# Altium PCB AUO.PcbDoc
Units mm, origin at the board's own origin, x right, y up, seen from the top; angles counter-clockwise.
Board outline 52.45 x 56.64 mm, 2 copper layers (Top Layer, Bottom Layer); 9 components, 36 nets, 94 pads, 8 vias.
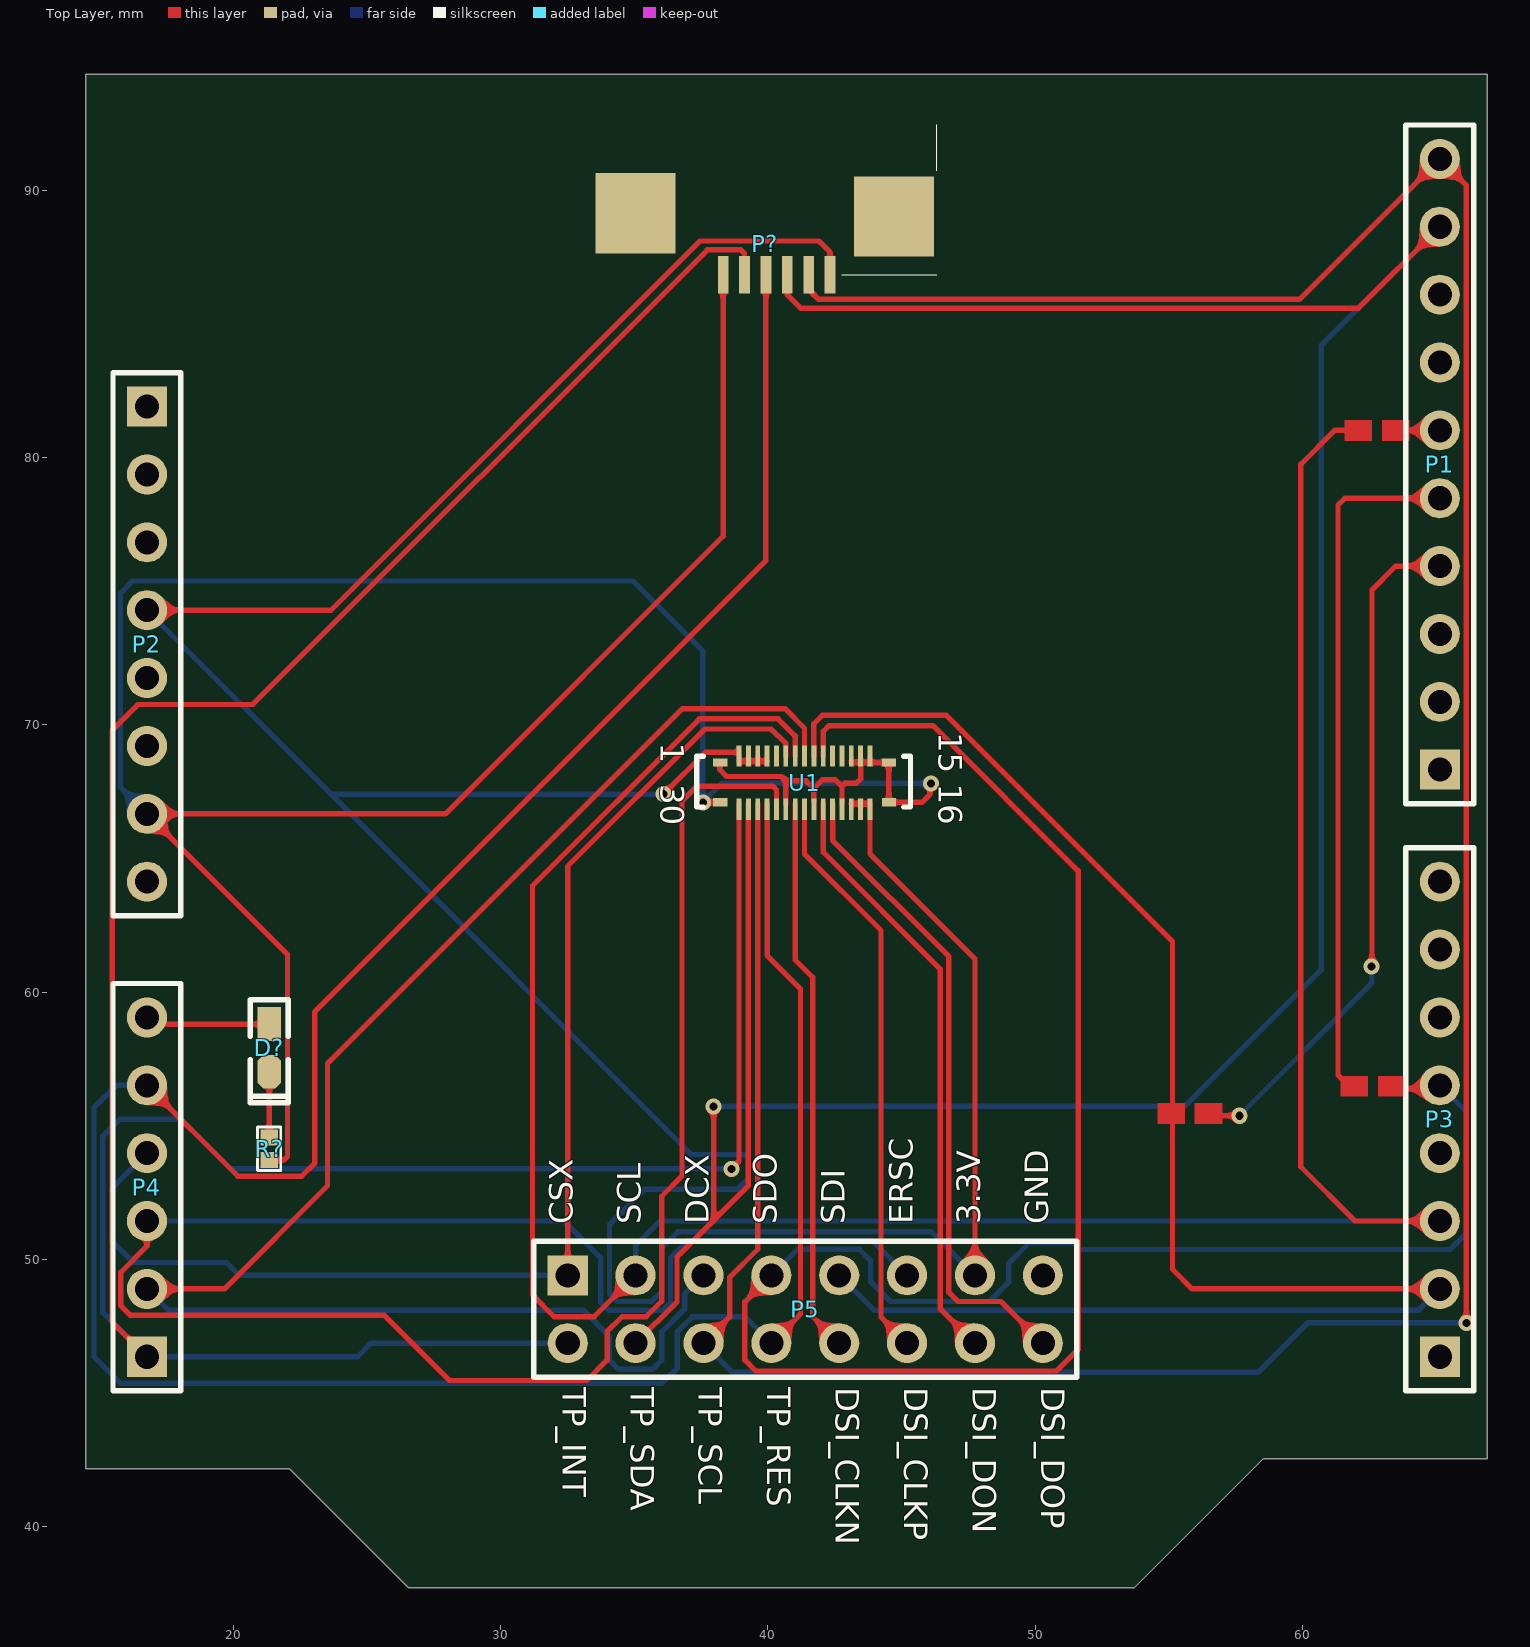
[diagram p0: Top Layer view]
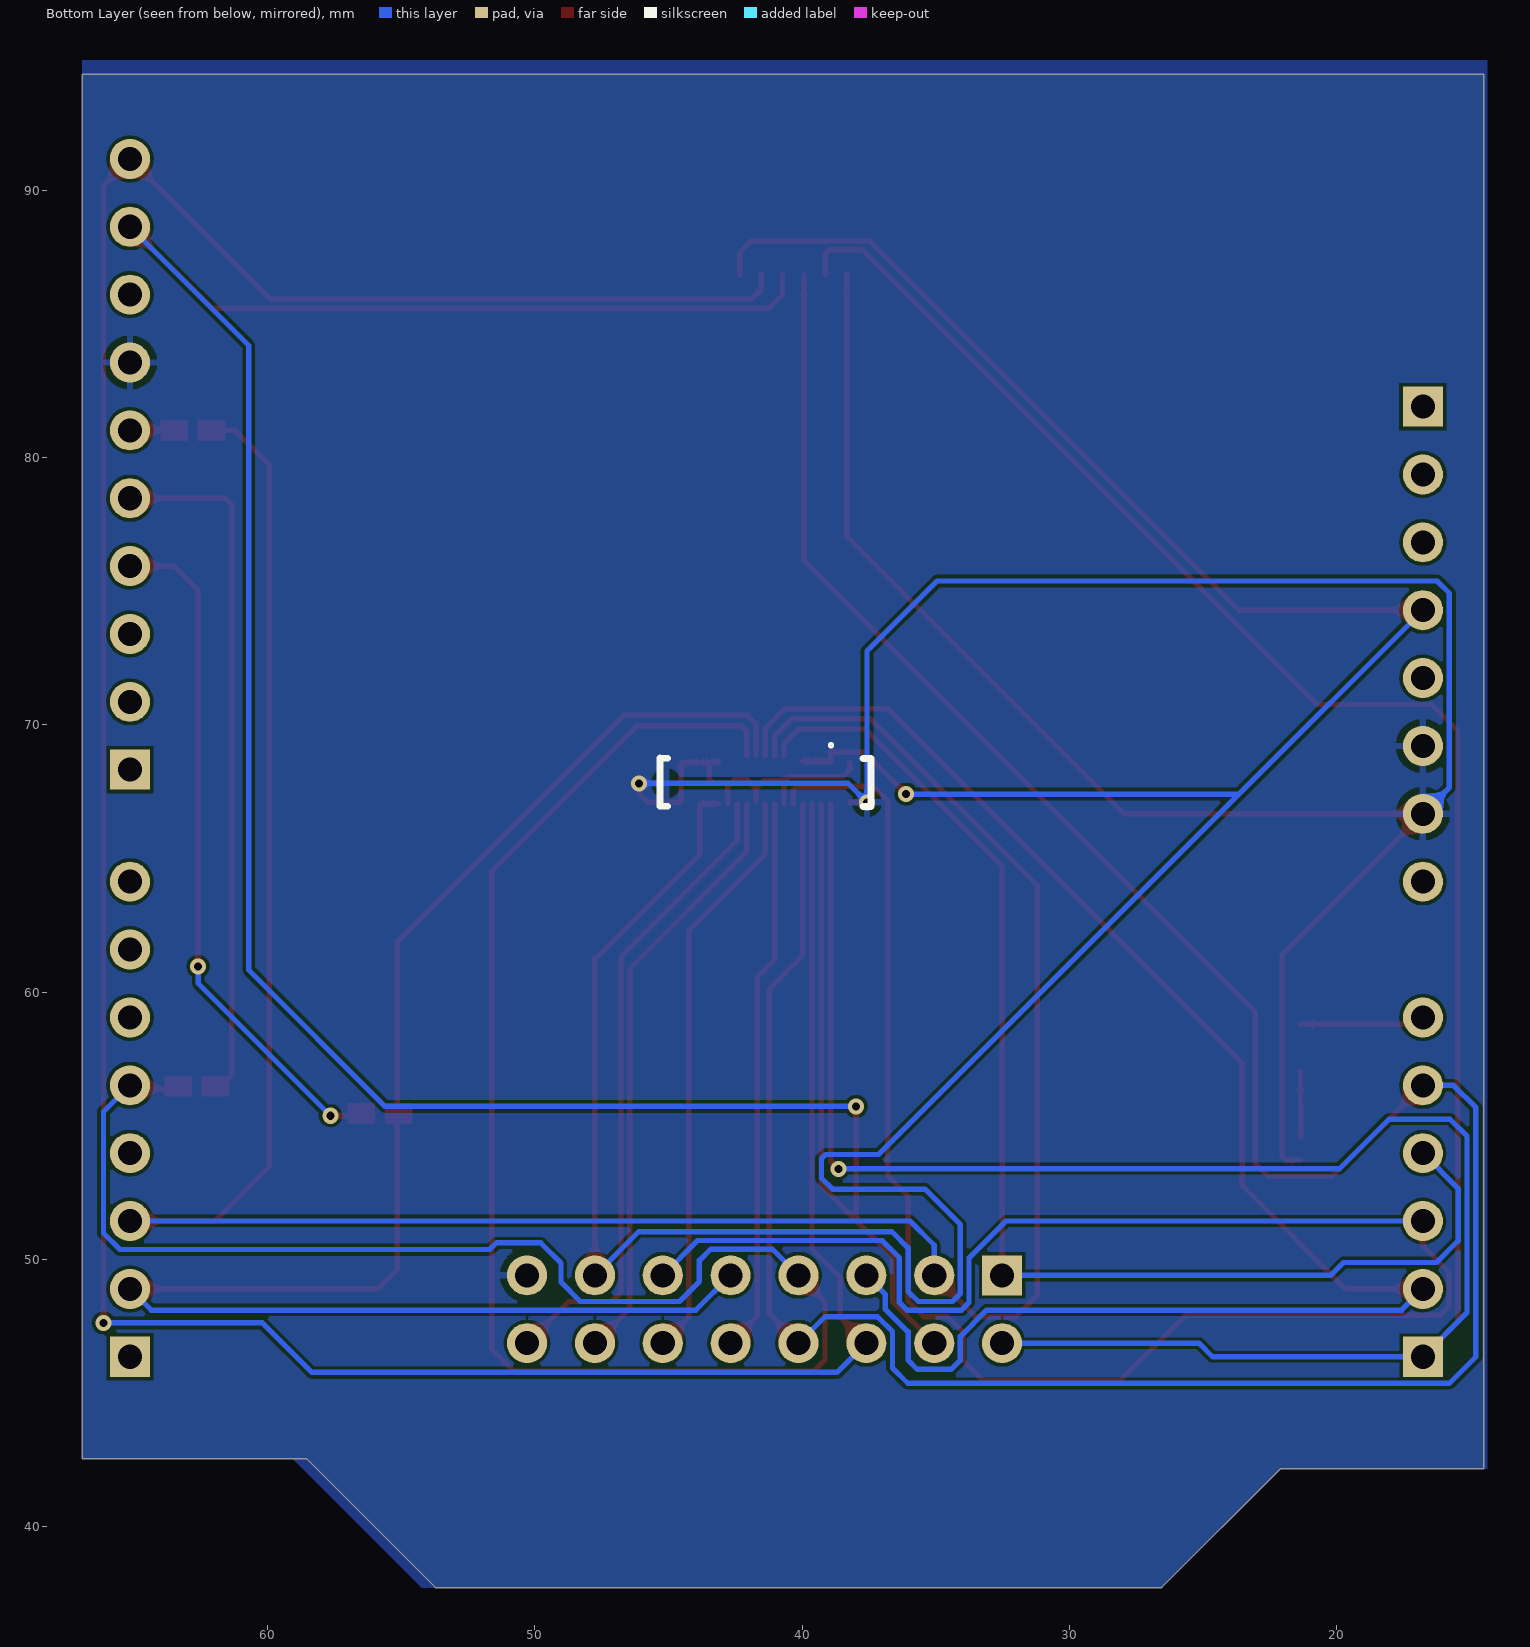
[diagram p1: Bottom Layer view, seen from below]

## Layer stack, top to bottom
Top Solder: solder mask 0.0102, Solder Resist, Dk 3.5
Top Layer: signal copper 0.0356
Dielectric 1: dielectric 0.32, FR-4, Dk 4.8
Bottom Layer: signal copper 0.0356
Bottom Solder: solder mask 0.0102, Solder Resist, Dk 3.5

## Board outline
14.478,42.164 14.478,94.361 66.929,94.361 66.929,42.545 58.547,42.545 53.721,37.719 26.543,37.719 22.098,42.164

## Design rules (kind name [scope] priority, off if disabled: settings)
Clearance [All] p1: gap=0.127 ignorepadtopadclearanceinfootprint=FALSE
PolygonConnect [All] p1: connectstyle=Relief reliefconductorwidth=0.254 reliefentries=4 polygonreliefangle="90 Angle" airgapwidth=0.254
RoutingVias [All] p1: holewidth=0.3 width=0.6 viastyle="Through Hole" minholewidth=0.3 minwidth=0.6 maxholewidth=0.3 maxwidth=0.6
SolderMaskExpansion [All] p1: expansion=0.102 istentingtop=FALSE
Width [All] p1: maxlimit=0.254 minlimit=0.102 preferedwidth=0.2
30 further rules are at their usual default settings.

## Components (designator, comment, footprint, x,y, rotation, side; value= is the part's Value field where it differs from the comment)
D? "LED" "D LED 0603B" 21.349,57.912 r270 top
P1 "Header 10" HDR1X10 65.151,68.326 r90 top locked
P2 "Header 8" HDR1X8 16.764,81.915 r270 top
P3 "Header 8" HDR1X8 65.151,46.355 r90 top locked
P4 "Header 6" HDR1X6 16.764,46.355 r90 top locked
P5 "Header 8X2" HDR2X8 32.512,49.403 r0 top locked
P? "Header 7" 7PIN_0.8MM 39.751,90.17 r0 top
R? "1KΩ ±5%" "R 0402" 21.336,54.145 r90 top
U1 "AXG130144" AXG30 37.484,68.699 r270 top

## Footprints (in the part's own frame and the unit in brackets; to place one, negate y for a bottom-side part, rotate by r counter-clockwise, add the part's x,y. Pads: shape width x height; smd on the part's side, far side on the other; paste and mask are expansions set on the pad)
7PIN_0.8MM [mm]
  rect 0.4x1.4 smd: 2(-1.422,-3.315) 3(-0.622,-3.315) 4(0.178,-3.315) 5(0.978,-3.315) 6(1.778,-3.315) 7(2.578,-3.315)
  rect 3x3 smd: 8(-4.699,-1.016) 9(4.976,-1.144)
  silkscreen extent 3.01,-3.31 6.58,2.29
AXG30 [mm]
  rect 0.8x0.18 smd: 1(-0.141,1.44) 2(-0.141,1.79) 3(-0.141,2.14) 4(-0.141,2.49) 5(-0.141,2.84) 6(-0.141,3.19) 7(-0.141,3.54) 8(-0.141,3.89) 9(-0.141,4.24) 10(-0.141,4.59) 11(-0.141,4.94) 12(-0.141,5.29) 13(-0.141,5.64) 14(-0.141,5.99) 15(-0.141,6.34) 16(1.849,6.34) 17(1.849,5.99) 18(1.849,5.64) 19(1.849,5.29) 20(1.849,4.94) 21(1.849,4.59) 22(1.849,4.24) 23(1.849,3.89) 24(1.849,3.54) 25(1.849,3.19) 26(1.849,2.84) 27(1.849,2.49) 28(1.849,2.14) 29(1.849,1.79) 30(1.849,1.44)
  rect 0.31x0.53 smd: 31(1.593,7.045) 32(0.103,7.045) 33(0.103,0.735) 34(1.593,0.735)
"D LED 0603B" [mil] "蓝色0603LED"
  rect 50x35 smd: 1(-35,-0.26)
  oct 50x35 smd: 2(35,-0.26)
  silkscreen extent -71,-28 81,28, body extent -31,-16 31,16, height 24
HDR1X6 [mm] "Connector; Header; 6 Position"
  rect 1.5x1.5 hole 0.9: 1(0,0)
  round 1.5 hole 0.9: 2(2.54,0) 3(5.08,0) 4(7.62,0) 5(10.16,0) 6(12.7,0)
  silkscreen extent -1.27,-1.27 13.97,1.27
HDR1X8 [mm] "Connector; Header; 8 Position"
  rect 1.5x1.5 hole 0.9: 1(0,0)
  round 1.5 hole 0.9: 2(2.54,0) 3(5.08,0) 4(7.62,0) 5(10.16,0) 6(12.7,0) 7(15.24,0) 8(17.78,0)
  silkscreen extent -1.27,-1.27 19.05,1.27
HDR1X10 [mm] "Connector; Header; 10 Position"
  rect 1.5x1.5 hole 0.9: 1(0,0)
  round 1.5 hole 0.9: 2(2.54,0) 3(5.08,0) 4(7.62,0) 5(10.16,0) 6(12.7,0) 7(15.24,0) 8(17.78,0) 9(20.32,0) 10(22.86,0)
  silkscreen extent -1.27,-1.27 24.13,1.27
HDR2X8 [mm] "Connector; Header; 8x2 Position"
  rect 1.5x1.5 hole 0.9: 1(0,0)
  round 1.5 hole 0.9: 2(0,-2.54) 3(2.54,0) 4(2.54,-2.54) 5(5.08,0) 6(5.08,-2.54) 7(7.62,0) 8(7.62,-2.54) 9(10.16,0) 10(10.16,-2.54) 11(12.7,0) 12(12.7,-2.54) 13(15.24,0) 14(15.24,-2.54) 15(17.78,0) 16(17.78,-2.54)
  silkscreen extent -1.27,-3.81 19.05,1.27
"R 0402" [mm]
  rect 0.6x0.65 smd: 1(-0.424,0) 2(0.424,0)
  silkscreen extent -0.82,-0.43 0.81,0.43, body extent -0.5,-0.25 0.5,0.25, height 0.3

## Part data
D?: "发光二极管"
P1: "Header, 10-Pin", LatestRevisionDate=17-Jul-2002, LatestRevisionNote="Re-released for DXP Platform.", Publisher="Altium Limited"
P2 P3: "Header, 8-Pin", LatestRevisionDate=17-Jul-2002, LatestRevisionNote="Re-released for DXP Platform.", Publisher="Altium Limited"
P4: "Header, 6-Pin", LatestRevisionDate=17-Jul-2002, LatestRevisionNote="Re-released for DXP Platform.", Publisher="Altium Limited"
P5: "Header, 8-Pin, Dual row", LatestRevisionDate=17-Jul-2002, LatestRevisionNote="Re-released for DXP Platform.", Publisher="Altium Limited"
P?: "Header, 7-Pin", LatestRevisionDate=17-Jul-2002, LatestRevisionNote="Re-released for DXP Platform.", Publisher="Altium Limited"
R?: library part R, "贴片电阻"
U1: Contributor=AI_QY, spicePre=U, spiceSymbolName=AXG130144

## Via types
v1: diameter 0.6, hole 0.3, Top Layer to Bottom Layer, 8 vias

## Nets (pads, with @x,y where several pads share a name; then routed paths per layer and width w, separated by ;. In a path a pad name is that pad's centre, name@x,y a point inside that pad or via, vN(x,y) a via of type N, cw(c..) or ccw(c..) an arc to the next point about the centre after c; other vN are vias at no path point)
+3V3: P2.4 P5.13 P?.7 U1.1 U1.2 U1.3 U1.4 U1.16 U1.17 U1.18 | length 126.3
  Top Layer w0.2: P2.4 23.647,74.295 37.465,88.113 41.91,88.113 42.329,87.694 P?.7 ; v1(36.102,67.412) 37.668,68.978 38.924,68.978 38.924,68.646 39.274,68.646 39.624,68.646 U1.4@39.974,68.646 ; U1.18@43.124,67.056 43.474,67.056 43.824,67.056 43.824,65.176 47.752,61.248 P5.13
  Bottom Layer w0.2: P2.4 23.647,67.412 ; v1(36.102,67.412) 23.647,67.412 ; P5.13 46.121,51.034 36.632,51.034 36.029,50.431 36.029,48.805 35.65,48.426 34.366,48.426 34.075,48.717 34.075,51.308 35.396,52.629 38.862,52.629 39.268,53.035 39.268,53.772 39.116,53.924 37.135,53.924 23.647,67.412
+5V: 
GND: P1.7 P2.6 P2.7 P5.15 P?.2 R?.1 U1.13 U1.14 U1.15 U1.19 U1.22 U1.25 U1.31 U1.32 U1.33 U1.34 | length 112.1
  Top Layer w0.2: R?.1 21.895,53.721 22.022,53.848 22.022,61.417 P2.7 27.94,66.675 38.329,77.064 P?.2 ; v1(37.567,67.107) U1.34 ; U1.33 38.202,68.596 38.202,68.326 38.456,68.072 40.513,68.072 40.674,67.911 ; U1.25@40.674,67.056 40.674,67.911 ; U1.22@41.724,67.15 41.724,67.623 ; U1.19@42.774,67.056 42.774,67.701 ; U1.13@43.124,68.646 43.124,68.606 43.134,68.596 U1.14@43.474,68.596 ; v1(46.101,67.818) 46.067,67.784 46.067,67.403 45.77,67.106 U1.31 U1.32 U1.14@43.474,68.596 ; 40.674,67.911 41.436,67.911 41.719,67.627 42.037,67.945 42.53,67.945 42.774,67.701 ; 42.774,67.701 42.909,67.835 42.926,67.818 43.307,67.818 43.474,67.985 U1.14@43.474,68.596
  Bottom Layer w0.2: P2.7 15.773,67.666 15.773,74.93 16.231,75.387 34.95,75.387 37.567,72.771 v1(37.567,67.107) 38.278,67.818 v1(46.101,67.818)
NetD?_1: D?.1 P4.6 | length 4.7
  Top Layer w0.2: P4.6 17.013,58.806 17.526,58.806 17.531,58.801 D?.1
NetD?_2: D?.2 R?.2 | length 2.5
  Top Layer w0.2: R?.2 21.336,55.778 21.343,55.785 D?.2
NetLD1_1: 
NetP1_1: P1.1
NetP1_2: P1.2
NetP1_3: P1.3
NetP1_4: P1.4 | length 26
  Top Layer w0.2: 56.261,55.372 56.264,55.375 v1(57.644,55.375) ; v1@62.611,60.96 62.611,75.057 63.5,75.946 P1.4
  Bottom Layer w0.2: v1(57.644,55.375) 62.597,60.328 v1(62.597,60.963)
NetP1_5: P1.5 | length 26.4
  Top Layer w0.2: 62.268,56.35 61.887,56.35 61.341,56.896 61.341,78.232 61.595,78.486 P1.5
NetP1_6: P1.6 | length 1.9
  Top Layer w0.2: 63.246,81.026 P1.6
NetP1_8: P1.8
NetP3_1: P3.1
NetP3_2: P3.2 P5.9 U1.9 | length 64.2
  Top Layer w0.2: U1.9 41.724,70.045 42.037,70.358 46.685,70.358 55.143,61.9 55.143,49.632 55.88,48.895 P3.2
  Bottom Layer w0.2: P5.9 43.976,48.099 64.355,48.099 P3.2
NetP3_3: P3.3 P5.3 U1.7 | length 100.6
  Top Layer w0.2: P5.3 33.503,47.854 32.004,47.854 31.191,48.666 31.191,63.983 37.44,70.231 40.386,70.231 41.024,69.593 U1.7 ; 62.484,81.026 61.214,81.026 59.944,79.756 59.944,53.467 61.976,51.435 P3.3
  Bottom Layer w0.2: P5.3 35.052,50.529 35.958,51.435 P3.3
NetP3_4: P3.4
NetP3_5: P3.5 P5.7 U1.10 | length 84.7
  Top Layer w0.2: P5.7 39.141,48.412 39.141,46.228 39.548,45.822 50.8,45.822 51.613,46.634 51.613,64.541 46.177,69.977 42.291,69.977 42.074,69.76 U1.10 ; 63.119,56.388 65.024,56.388 P3.5
  Bottom Layer w0.2: P5.7 41.109,50.38 43.422,50.38 43.84,49.962 43.84,49.174 44.589,48.426 48.299,48.426 49.022,49.149 49.022,49.86 49.784,50.622 51.435,50.622 51.689,50.368 65.532,50.368 66.142,50.978 66.142,55.524 P3.5
NetP3_6: P3.6
NetP3_7: P3.7
NetP3_8: P3.8
NetP4_1: P4.1 P5.2 P?.3 U1.30 | length 119.2
  Top Layer w0.2: P4.1 15.46,47.659 15.46,69.791 16.434,70.764 20.719,70.764 37.737,87.782 38.989,87.782 39.129,87.643 P?.3 ; v1(38.633,53.391) 38.924,53.681 U1.30@38.924,67.056
  Bottom Layer w0.2: P5.2 25.146,46.863 24.638,46.355 P4.1 15.113,48.006 15.113,54.61 15.748,55.245 18.034,55.245 19.888,53.391 v1(38.633,53.391)
NetP4_2: P4.2 P5.5 U1.8 | length 62.6
  Top Layer w0.2: P4.2 19.66,48.895 23.52,52.756 23.52,57.328 36.805,70.612 40.64,70.612 41.374,69.878 U1.8
  Bottom Layer w0.2: P4.2 17.56,48.099 33.094,48.099 34.075,47.118 34.075,46.228 34.417,45.886 35.687,45.886 36.029,46.228 36.029,47.288 36.887,48.147 36.887,48.698 P5.5
NetP4_3: P4.3 P5.11 U1.26 | length 83.6
  Top Layer w0.2: P4.3 16.764,50.495 15.787,49.518 15.787,48.26 16.143,47.904 25.654,47.904 28.092,45.466 33.223,45.466 33.985,46.228 33.985,47.295 34.544,47.854 35.445,47.854 36.029,48.438 36.029,52.361 36.786,53.118 36.786,67.148 37.338,67.7 40.199,67.7 40.324,67.575 U1.26@40.324,67.056
  Bottom Layer w0.2: P4.3 32.368,51.435 33.748,50.055 33.748,48.387 34.036,48.099 36.068,48.099 36.356,48.387 36.356,50.061 37.002,50.707 43.908,50.707 P5.11
NetP4_4: P4.4 P5.1 U1.6 | length 47.7
  Top Layer w0.2: P5.1 32.512,64.721 37.641,69.85 40.125,69.85 40.674,69.301 U1.6
  Bottom Layer w0.2: P4.4 15.443,52.654 15.443,50.698 16.256,49.886 19.736,49.886 20.218,49.403 P5.1
NetP4_5: P4.5 P5.8 P?.4 U1.27 | length 109
  Top Layer w0.2: P4.5 20.168,53.111 22.555,53.111 23.038,53.594 23.038,59.258 39.929,76.149 P?.4 ; U1.27@39.974,67.056 39.974,61.372 41.224,60.122 41.224,47.955 P5.8
  Bottom Layer w0.2: P4.5 15.621,56.515 14.783,55.677 14.783,46.355 15.773,45.364 36.043,45.364 36.615,45.937 36.615,47.295 37.174,47.854 39.141,47.854 P5.8
NetP5_10: P5.10 U1.24 | length 20.9
  Top Layer w0.2: U1.24@41.024,67.056 41.024,61.214 41.681,60.557 41.681,47.854 P5.10
NetP5_12: P5.12 U1.23 | length 21.8
  Top Layer w0.2: U1.23@41.374,67.056 41.374,65.179 44.235,62.318 44.235,47.84 P5.12
NetP5_14: P5.14 U1.21 | length 22.5
  Top Layer w0.2: U1.21@42.074,67.056 42.074,65.241 46.448,60.867 46.448,48.167 P5.14
NetP5_16: P5.16 U1.20 | length 24.4
  Top Layer w0.2: U1.20@42.424,67.056 42.424,65.678 46.775,61.327 46.775,48.768 47.117,48.426 48.729,48.426 P5.16
NetR1_1: 
NRST: 
PB8: P1.10 P5.6 P?.6 U1.28 | length 121.3
  Top Layer w0.2: P5.6 38.569,47.84 38.569,49.325 39.624,50.38 U1.28@39.624,67.056 ; P?.6 41.529,86.301 41.902,85.928 59.893,85.928 P1.10 66.142,90.195 v1(66.142,47.625)
  Bottom Layer w0.2: P5.6 38.684,45.771 58.344,45.771 60.198,47.625 v1(66.142,47.625)
PB9: P1.9 P5.4 P?.5 U1.29 | length 107.4
  Top Layer w0.2: P5.4 36.601,48.412 36.601,50.089 37.973,51.46 ; v1(37.973,55.728) 37.973,51.46 ; U1.29@39.274,67.056 39.274,52.761 37.973,51.46 ; P?.5 40.729,86.093 41.221,85.601 62.106,85.601 P1.9
  Bottom Layer w0.2: v1(37.973,55.728) 55.601,55.728 60.706,60.833 60.706,84.201 P1.9
VIN: 
VREF+: 
pads on no net: P2.1 P2.2 P2.3 P2.5 P2.8 P?.8 P?.9 U1.5 U1.11 U1.12

## Polygon pours and split planes (outlines as drawn)
GND on Bottom Layer "GND_L02_P000" (solid, pour order 0): 14.351,42.164 22.098,42.164 26.543,37.719 54.229,37.719 59.055,42.545 66.929,42.545 66.929,94.869 14.351,94.869 66.802,94.869 14.351,94.869

## Other copper
Top Layer:
  region net NetP3_2: 54.585,55.845 55.601,55.845 55.601,55.083 54.585,55.083
  region net NetP1_4: 55.982,55.845 56.998,55.845 56.998,55.083 55.982,55.083
  region net NetP1_5: 61.443,56.861 62.459,56.861 62.459,56.099 61.443,56.099
  region net NetP3_5: 62.84,56.861 63.856,56.861 63.856,56.099 62.84,56.099
  region net NetP1_6: 62.992,81.407 64.008,81.407 64.008,80.645 62.992,80.645
  region net NetP3_3: 61.595,81.407 62.611,81.407 62.611,80.645 61.595,80.645

## Silkscreen, mask and mechanical layers (free items; w line width, h text height)
Top Overlay:
  lines w0.2: 37.592,66.929 37.338,66.929 37.338,68.834 37.592,68.834 ; 45.085,66.929 45.339,66.929 45.339,68.834 45.085,68.834
  text "15 16" at 46.101,69.723 h1.52 r270
  text "1  30" at 35.687,69.342 h1.52 r270
  text "CSX" at 33.003,51.308 h1.52 r90
  text "SCL" at 35.547,51.308 h1.52 r90
  text "DCX" at 38.092,51.308 h1.52 r90
  text "SDO" at 40.636,51.308 h1.52 r90
  text "SDI" at 43.18,51.308 h1.52 r90
  text "ERSC" at 45.724,51.308 h1.52 r90
  text "3.3V" at 48.256,51.308 h1.52 r90
  text "GND" at 50.8,51.308 h1.52 r90
  text "TP_INT" at 32.021,45.212 h1.52 r270
  text "TP_SDA" at 34.564,45.212 h1.52 r270
  text "TP_SCL" at 37.125,45.212 h1.52 r270
  text "TP_RES" at 39.685,45.212 h1.52 r270
  text "DSI_CLKN" at 42.246,45.212 h1.52 r270
  text "DSI_CLKP" at 44.807,45.212 h1.52 r270
  text "DSI_DON" at 47.367,45.212 h1.52 r270
  text "DSI_DOP" at 49.928,45.212 h1.52 r270
Mechanical 1:
  the board outline again, w0.254
Mechanical 76:
  text "String" at 46.355,69.596 h1.52